# Altium PCB PCB_motor_driver_V1.PcbDoc
Units mm, origin at the board's own origin, x right, y up, seen from the top; angles counter-clockwise.
Board outline 16.97 x 11.96 mm, 2 copper layers (Top Layer, Bottom Layer), stack 0.581 mm thick; 20 components, 34 nets, 105 pads, 35 vias.
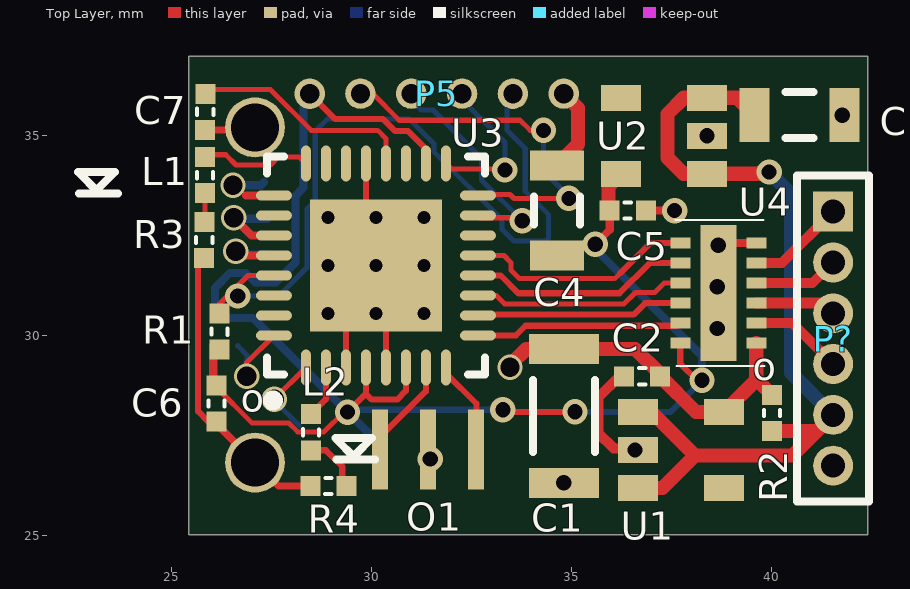
[diagram p0: Top Layer view]
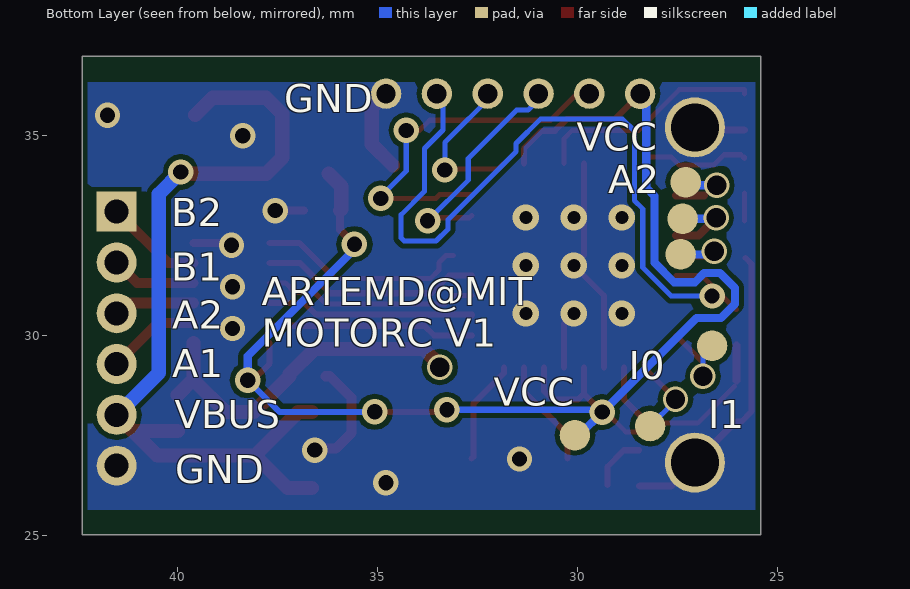
[diagram p1: Bottom Layer view, seen from below]

## Layer stack, top to bottom
Top Solder: solder mask 0.0102, Solder Resist, Dk 3.5
Top Layer: signal copper 0.0356
Dielectric 1: core 0.51, FR-4, Dk 4.2
Bottom Layer: signal copper 0.0356
Bottom Solder: solder mask 0.0102, Solder Resist, Dk 3.5

## Board outline
25.426,25.019 25.426,36.982 42.392,36.982 42.392,25.019

## Design rules (kind name [scope] priority, off if disabled: settings)
Clearance [All] p1: gap=0.127
PolygonConnect [All] p1: connectstyle=Direct reliefconductorwidth=0.254 reliefentries=4 polygonreliefangle="90 Angle" airgapwidth=0.254
RoutingVias [All] p1: holewidth=0.635 width=0.381 viastyle="Through Hole" minholewidth=0.381 minwidth=0.635 maxholewidth=2.54 maxwidth=3.81
SolderMaskExpansion [All] p1: expansion=0.102
Width [All] p1: maxlimit=0.508 minlimit=0.127 preferedwidth=0.152
30 further rules are at their usual default settings.

## Components (designator, comment, footprint, x,y, rotation, side; value= is the part's Value field where it differs from the comment)
C1 "100uF 6.3V" CAP1206 34.798,27.991 r270 top
C2 "0.1uF" 0402W 36.373,28.981 r0 top
C3 "10uF 16V" CAP0805 40.691,35.509 r0 top
C4 "10uF 6.3V" CAP0805 34.62,33.122 r90 top
C5 "0.1uF" 0402W 36.779,33.122 r180 top
C6 "0.1uF" 0402W 26.111,27.915 r90 top
C7 "0.1uF" 0402W 25.832,35.204 r90 top
L1 "LED" 0402W 25.832,34.392 r270 top
L2 "LED" 0402W 28.473,27.965 r270 top
O1 "Resonator SMD" "Resonator SMD" 30.632,27.203 r90 top
P5 "6 pin smd 1.27mm female" "6pos 1.27mm" 34.925,43.993 r0 top
P? "MHDR1X6" MHDR1X6 41.529,33.096 r270 top
R1 "10k" 0402W 26.187,30.48 r270 top
R2 "0 Ohm" 0402W 40.005,28.448 r270 top
R3 "330" 0402W 25.806,32.004 r90 top
R4 "330" 0402W 28.524,26.238 r0 top
U1 "5.0V REG" SOT-23-5 38.278,27.686 r270 top
U2 "3.3 V REG" SOT-23-5 36.754,34.442 r90 top
U3 "ATmega328P-MUR" 32M1-A_M 30.099,31.75 r90 top
U4 "DRV8835" WSON-16 38.659,31.064 r180 top

## Footprints (in the part's own frame and the unit in brackets; to place one, negate y for a bottom-side part, rotate by r counter-clockwise, add the part's x,y. Pads: shape width x height; smd on the part's side, far side on the other; paste and mask are expansions set on the pad)
"6pos 1.27mm" [mil]
  round 30 hole 19: 1(-255.18,-312.9) 2(-205.22,-312.81) 3(-155.19,-312.82) 4(-105.18,-312.84) 5(-55.15,-312.85) 6(-5.14,-312.83)
32M1-A_M [mm] "QFN, 32-Leads, Body 5x5mm, Pitch 0.5mm, IPC Low Density"
  oval 0.9x0.25 smd: 1(-2.55,1.75) 2(-2.55,1.25) 3(-2.55,0.75) 4(-2.55,0.25) 5(-2.55,-0.25) 6(-2.55,-0.75) 7(-2.55,-1.25) 8(-2.55,-1.75) 17(2.55,-1.75) 18(2.55,-1.25) 19(2.55,-0.75) 20(2.55,-0.25) 21(2.55,0.25) 22(2.55,0.75) 23(2.55,1.25) 24(2.55,1.75)
  oval 0.25x0.9 smd: 9(-1.75,-2.55) 10(-1.25,-2.55) 11(-0.75,-2.55) 12(-0.25,-2.55) 13(0.25,-2.55) 14(0.75,-2.55) 15(1.25,-2.55) 16(1.75,-2.55) 25(1.75,2.55) 26(1.25,2.55) 27(0.75,2.55) 28(0.25,2.55) 29(-0.25,2.55) 30(-0.75,2.55) 31(-1.25,2.55) 32(-1.75,2.55)
  rect 3.3x3.3 smd: 33(0,0)
  silkscreen extent -3.5,-2.73 2.73,2.73, body extent -2.58,-2.58 2.58,2.58, height 1
0402W [mm]
  rect 0.5x0.5 smd: 1(-0.066,0) 2(0.834,-0.001)
  silkscreen extent 0.31,-0.2 0.46,0.2, body extent -0.08,-0.25 0.85,0.25, height 0.2
CAP0805 [mm] "Chip Capacitor, 2-Leads, Body 2.0x1.2mm, IPC Medium Density"
  rect 0.75x1.35 smd: 1(-1.125,0) 2(1.125,0)
  silkscreen extent -0.35,-0.58 0.35,0.58, body extent -1,-0.62 1,0.63, height 0.78
CAP1206 [mm] "Chip Capacitor, 2-Leads, Body 3.2x1.6mm, IPC Medium Density"
  rect 0.75x1.75 smd: 1(-1.675,0) 2(1.675,0)
  silkscreen extent -0.9,-0.77 0.9,0.77, body extent -1.6,-0.8 1.6,0.8, height 1
MHDR1X6 [mm] "Connector; Header; 6 Position"
  rect 1x1 hole 0.6: 1(0,0)
  round 1 hole 0.6: 2(1.27,0) 3(2.54,0) 4(3.81,0) 5(5.08,0) 6(6.35,0)
  silkscreen extent -0.9,-0.9 7.25,0.9
"Resonator SMD" [mm]
  rect 2x0.4 smd: 1(-0.05,-1.975) 2(-0.051,-0.775) 3(-0.051,0.425)
  body extent -0.77,-2.35 0.8,0.8, height 1.15
SOT-23-5 [mm]
  rect 0.65x1 smd: 1(-0.4,-1.625) 2(0.55,-1.625) 3(1.5,-1.625) 4(1.5,0.525) 5(-0.4,0.525)
  body extent -0.77,-1.68 1.88,0.58, height 1.1
WSON-16 [mm]
  rect 0.9x3.4 smd: 0(0.001,0.003)
  rect 0.5x0.28 smd mask+0.07: 1(-0.949,1.253) 2(-0.949,0.753) 3(-0.949,0.253) 4(-0.949,-0.247) 5(-0.949,-0.747) 6(-0.949,-1.247) 7(0.951,-1.247) 8(0.951,-0.747) 9(0.951,-0.247) 10(0.951,0.253) 11(0.951,0.753) 12(0.951,1.253)
  silkscreen extent -1.15,-1.82 1.08,1.83, body extent -1,-1.5 1,1.5, height 0.8

## Part data
C1 C3 C4: library part Capacitor_pol, "Polarised capacitor"
C2 C5 C6 C7: library part Capacitor, "SMD Cap 1206"
L1 L2: "LED SMD 1206/0603"
O1: "Build in caps"
P?: "Header, 6-Pin"
R1 R2 R3 R4: library part Resistor
U1 U2: library part MIC5205_VOLTAGE_REG, "5V LDO SMD"
U3: "8-bit AVR Microcontroller, 32KB Flash, 1KB EEPROM, 2KB SRAM, 32-pin MLF, Industrial Grade (-40°C to 85°C)"

## Free pads (board coordinates)
  round 1.5 hole 1.2: 4(27.076,26.822) 4(27.076,35.204)
  round 0.762 smd far side: 5(26.645,29.743) 5(27.305,33.833) 5(27.381,32.918) 5(27.432,32.029) 5(28.194,27.737) 5(30.074,27.508)

## Via types
v1: diameter 0.635, hole 0.381, Top Layer to Bottom Layer, tented both sides, 12 vias
v2: diameter 0.66, hole 0.33, Top Layer to Bottom Layer, tented top, 9 vias
v3: diameter 0.635, hole 0.381, Top Layer to Bottom Layer, 8 vias
v4: diameter 0.635, hole 0.483, Top Layer to Bottom Layer, 6 vias

## Nets (pads, with @x,y where several pads share a name; then routed paths per layer and width w, separated by ;. In a path a pad name is that pad's centre, name@x,y a point inside that pad or via, vN(x,y) a via of type N, cw(c..) or ccw(c..) an arc to the next point about the centre after c; other vN are vias at no path point)
A0: U3.23
A2: pad.5@27.305,33.833 U3.25 | length 1.5
  Top Layer w0.203: 26.85,33.5 U3.25
  Bottom Layer w0.203: v4(26.525,33.756) 27.228,33.756 pad.5@27.305,33.833
A3: U3.26
AINT1: U3.10 U4.10 | length 5.2
  Top Layer w0.152: U3.10 32.649,30.523 36.543,30.523 36.831,30.811 U4.10
AINT2: U3.11 U4.9 | length 5.4
  Top Layer w0.127: U3.11 33.11,31 33.319,30.79 36.298,30.79 36.586,31.078 37.072,31.078 37.306,31.311 U4.9
AOUT1: P?.4 U4.2 | length 2.5
  Top Layer w0.254: U4.2 40.504,30.311 P?.4 ; P?.4@41.275,29.083 P?.4@41.326,29.083
  Top Layer w0.279: P?.4@41.326,29.083 P?.4@41.326,29.159
AOUT2: P?.3 U4.3 | length 2
  Top Layer w0.279: U4.3 41.274,30.811 P?.3
BIN1: U3.12 U4.8 | length 5.6
  Top Layer w0.152: U3.12 33.217,31.5 33.66,31.057 36.188,31.057 36.942,31.811 U4.8
BIN2: U3.13 U4.7 | length 5.3
  Top Layer w0.127: 33.112,32 33.299,32 33.473,31.826 33.473,31.635 33.688,31.42 36.068,31.42 36.207,31.559
  Top Layer w0.152: 36.207,31.559 36.957,32.309 37.705,32.309 U4.7
BOUT1: P?.2 U4.4 | length 2.1
  Top Layer w0.254: U4.4 41.014,31.311 P?.2
BOUT2: P?.1 U4.5 | length 2.5
  Top Layer w0.254: U4.5 40.244,31.811 P?.1
GND: C1.2 C2.1 C3.2 C4.2 C5.1 C6.1 C7.1 O1.2 P5.6 P?.6 pad.4 R3.1 R4.1 U1.2 U2.2 U3.3 U3.5 U3.21 U3.33 U4.0 U4.6 | length 22.6
  Top Layer w0.152: R3.1 25.654,31.785 25.654,28.103 25.908,27.849 C6.1 ; U3.3 29.349,31 v2(30.099,31.75) 29.849,32 U3.21 ; v2(30.099,30.55) 30.349,30.3 U3.5 ; v3(31.458,26.911) O1.2@31.458,26.924
  Top Layer w0.178: C7.1 27.01,35.138 pad.4@27.076,35.204 ; C6.1@26.081,27.818 27.076,26.822 27.661,26.238 R4.1
  Top Layer w0.203: C5.1 v1(37.567,33.122) ; v3(38.659,32.258) 38.712,32.311 U4.6
  Top Layer w0.254: C2.1 36.195,28.981 35.662,28.448 35.662,27.559 36.043,27.178 36.534,27.178 v3(36.576,27.136)
  Top Layer w0.356: C4.2 35.154,34.78 35.154,35.688 P5.6 ; v3(36.576,27.136) U1.2 ; v3(41.758,35.509) C3.2
  other v2: 28.899,30.55 31.299,30.55 28.899,31.75 31.299,31.75 28.899,32.95 30.099,32.95 31.299,32.95
  other v3: 34.798,26.316 38.634,30.176 38.633,31.217 38.379,34.992
INT0: pad.5@26.645,29.743 U3.32 | length 2.2
  Top Layer w0.127: v4(26.873,28.981) 26.848,29.007 26.848,29.299 U3.32
  Bottom Layer w0.127: pad.5@26.645,29.743 26.873,29.515 v4(26.873,28.981)
INT1: pad.5@28.194,27.737 U3.1 | length 2.1
  Top Layer w0.127: v4(27.559,28.41) U3.1
  Bottom Layer w0.127: v4(27.559,28.41) 27.559,28.372 pad.5@28.194,27.737
LED1: L1.1 U3.24 | length 2.8
  Top Layer w0.127: L1.1 25.831,34.424 25.926,34.519 26.347,34.519 26.602,34.264 27.466,34.264 27.66,34.458 28.191,34.458 U3.24
LED2: L2.1 U3.2 | length 1.3
  Top Layer w0.152: L2.1 28.849,28.407 U3.2
MISO: P5.2 U3.16 | length 9.3
  Top Layer w0.127: P5.2 30.018,36.047 30.683,35.382 33.703,35.382 33.957,35.128 v1(34.29,35.128) ; U3.16 32.677,33.528 33.452,33.528 33.553,33.426 v1(34.925,33.426)
  Bottom Layer w0.127: v1(34.29,35.128) 34.29,34.112 34.925,33.477 v1(34.925,33.426)
MODE: U3.9 U4.11 | length 5.2
  Top Layer w0.152: U3.9 33.595,30 33.839,30.244 37.64,30.244 U4.11
MOSI: P5.3 U3.15 | length 6.1
  Top Layer w0.127: U3.15 32.705,32.944 33.934,32.944 33.858,32.868 v1(33.757,32.868)
  Bottom Layer w0.127: P5.3@30.831,36.047 31.242,35.636 31.529,35.636 32.741,34.424 32.741,33.884 v1(33.757,32.868)
NetC7_2: C7.2 U3.20 | length 5.8
  Top Layer w0.127: C7.2 25.833,36.145 27.466,36.145 28.483,35.128 30.142,35.128 30.349,34.921 U3.20
NetL1_2: L1.2 R3.2 | length 0.7
  Top Layer w0.127: R3.2@25.831,32.861 L1.2
NetL2_2: L2.2 R4.2 | length 1.4
  Top Layer w0.152: L2.2 28.851,27.131 29.257,26.725 R4.2@29.257,26.262
NetO1_1: O1.1 U3.8 | length 2.6
  Top Layer w0.152: U3.8 31.849,29.06 32.614,28.296 32.614,26.969 O1.1@32.658,26.925
NetO1_3: O1.3 U3.7 | length 2.7
  Top Layer w0.152: O1.3@30.258,26.924 30.258,27.515 31.349,28.606 U3.7
PB2: U3.14
RESET: P5.5 R1.1 U3.29 | length 18.9
  Top Layer w0.127: R1.1@26.035,30.648 26.05,30.648 26.903,31.5 U3.29
  Bottom Layer w0.127: v1(26.645,30.988) 27.667,30.988 28.378,31.699 28.378,33.166 28.583,33.37 28.583,35.111 28.88,35.408 30.937,35.408 31.547,34.798 31.547,34.595 33.249,32.893 33.249,32.657 33.546,32.36 34.341,32.36 34.417,32.436 34.417,33.02 33.833,33.604 33.833,34.674 33.372,35.135 P5.5@33.372,36.047
RX: U3.30
SCK: P5.4 U3.17 | length 4.2
  Top Layer w0.127: U3.17 31.986,34.163 33.299,34.163 v1(33.325,34.138) ; P5.4@32.101,36.047 P5.4@32.381,36.047
  Bottom Layer w0.127: P5.4@32.101,36.047 33.325,34.823 v1(33.325,34.138)
SCL: pad.5@27.432,32.029 U3.28 | length 1.9
  Top Layer w0.203: v4(26.594,32.106) 26.699,32 U3.28
  Bottom Layer w0.203: v4(26.594,32.106) 26.67,32.029 pad.5@27.432,32.029
SDA: pad.5@27.381,32.918 U3.27 | length 2
  Top Layer w0.203: v4(26.543,32.944) 26.987,32.5 U3.27
  Bottom Layer w0.203: v4(26.543,32.944) 26.568,32.918 pad.5@27.381,32.918
TX: U3.31
VBUS: C3.1 P?.5 R2.2 U1.1 U1.3 U2.1 U2.3 | length 21.7
  Top Layer w0.356: U1.3 37.26,26.186 38.075,27 ; U1.1 36.989,28.086 38.075,27 ; C3.1 39.133,35.942 U2.3 37.797,35.942 37.389,35.535 37.389,34.442 37.789,34.042 U2.1 39.884,34.042 v1(39.929,34.087) ; R2.2 41.126,27.614 ; P?.5 41.126,27.614 ; 38.075,27 40.513,27 41.126,27.614
  Bottom Layer w0.356: v1(39.929,34.087) 40.475,33.541 40.475,29.07 P?.5
VCC: C4.1 C5.2 C6.2 P5.1 pad.5@30.074,27.508 R1.2 U2.5 U3.4 U3.6 U3.18 U4.12 | length 41.5
  Top Layer w0.127: C6.2@26.09,28.724 27.005,27.808 27.927,27.808 28.144,27.591 28.802,27.591 29.295,28.084 v1(29.388,28.084)
  Top Layer w0.152: P5.1 29.081,35.408 30.281,35.408 30.573,35.115 30.899,35.115 31.349,34.666 U3.18 ; v1(29.388,28.084) 29.849,28.546 ; U3.4 29.849,28.546 ; U3.6 30.849,28.614 30.632,28.397 29.997,28.397 29.849,28.546 ; v1(33.274,28.143) 33.223,28.092 v1(35.077,28.092) ; U4.12 37.708,29.298 38.151,28.854 38.227,28.854 v1(38.252,28.88)
  Top Layer w0.203: C6.2@26.034,28.874 R1.2@26.034,29.747 ; v1(35.585,32.283) 35.945,32.643 C5.2
  Top Layer w0.356: C5.2 35.916,33.152 35.916,33.729 U2.5
  Bottom Layer w0.152: v1(29.388,28.084) 29.447,28.143 v1(33.274,28.143) v1@33.325,28.092 ; v1(35.077,28.092) 35.085,28.084 37.457,28.084 v1(38.252,28.88)
  Bottom Layer w0.203: P5.1@28.291,36.045 28.291,33.696 28.086,33.491 28.086,31.82 27.597,31.331 27.074,31.331 26.845,31.559 26.444,31.559 26.073,31.189 26.073,30.787 26.418,30.442 27.03,30.442 v1(29.388,28.084) 29.964,27.508 pad.5@30.074,27.508 ; v1@35.522,32.22 38.252,29.489 v1(38.252,28.88)
VM: C1.1 C2.2 R2.1 U1.5 U4.1 | length 8.9
  Top Layer w0.356: v4(33.452,29.21) 33.452,29.261 33.857,29.666 C1.1 36.577,29.666 37.207,29.036 C2.2 38.101,28.086 U1.5 39.608,28.891 39.608,28.911 ; U4.1 39.608,28.911 ; R2.1 39.608,28.911
pads on no net: U1.4 U2.4 U3.19 U3.22

## Polygon pours and split planes (outlines as drawn)
GND on Bottom Layer "Signal Layer 1-No Net" (solid, remove dead copper, pour order 4): 25.425,25.476 25.4,25.502 25.4,36.5 42.393,36.5 42.418,36.474 42.418,25.502

## Silkscreen, mask and mechanical layers (free items; w line width, h text height)
Top Overlay:
  lines w0.2: 22.682,33.553 23.647,33.553 ; 23.165,33.553 23.165,33.579 ; 29.108,26.899 30.074,26.899 ; 29.591,26.899 29.591,26.924 ; 23.165,33.579 23.165,33.68 23.571,34.087 22.657,34.087 23.165,33.579 ; 29.591,26.924 29.083,27.432 29.997,27.432 29.591,27.026 29.591,26.924
  text "o" at 26.721,28.092 h0.7
Bottom Overlay:
  text "GND" at 37.338,35.585 h0.7
  text "VCC" at 30.023,34.62 h0.7
  text "A2" at 29.235,33.553 h0.7
  text "B2" at 40.164,32.737 h0.7
  text "B1" at 40.164,31.365 h0.7
  text "ARTEMD@MIT" at 37.897,30.759 h0.7
  text "A2" at 40.139,30.171 h0.7
  text "MOTORC V1" at 37.897,29.718 h0.7
  text "A1" at 40.139,28.952 h0.7
  text "I0" at 28.727,28.905 h0.7
  text "VCC" at 32.106,28.245 h0.7
  text "I1" at 26.746,27.686 h0.7
  text "VBUS" at 40.081,27.686 h0.7
  text "GND" at 40.063,26.31 h0.7
Mechanical 1:
  lines w0.051: 37.105,35.486 37.13,35.512 ; 25.4,24.994 42.418,24.994 42.418,36.982 42.393,37.008 25.4,37.008 25.4,24.994

## Text inside footprints (layer, text, board x,y; h text height)
U4: Top Overlay "o" at 40.109,29.406 h0.7 r180